# Altium PCB pcb_SiAlarmV1.PcbDoc
Units mil, origin at the board's own origin, x right, y up, seen from the top; angles counter-clockwise.
Board outline 6000 x 4000 mil, 2 copper layers (Top Layer, Bottom Layer); 26 components, 39 nets, 225 pads, 0 vias.
Unrouted connection lines stored in the file: 83.
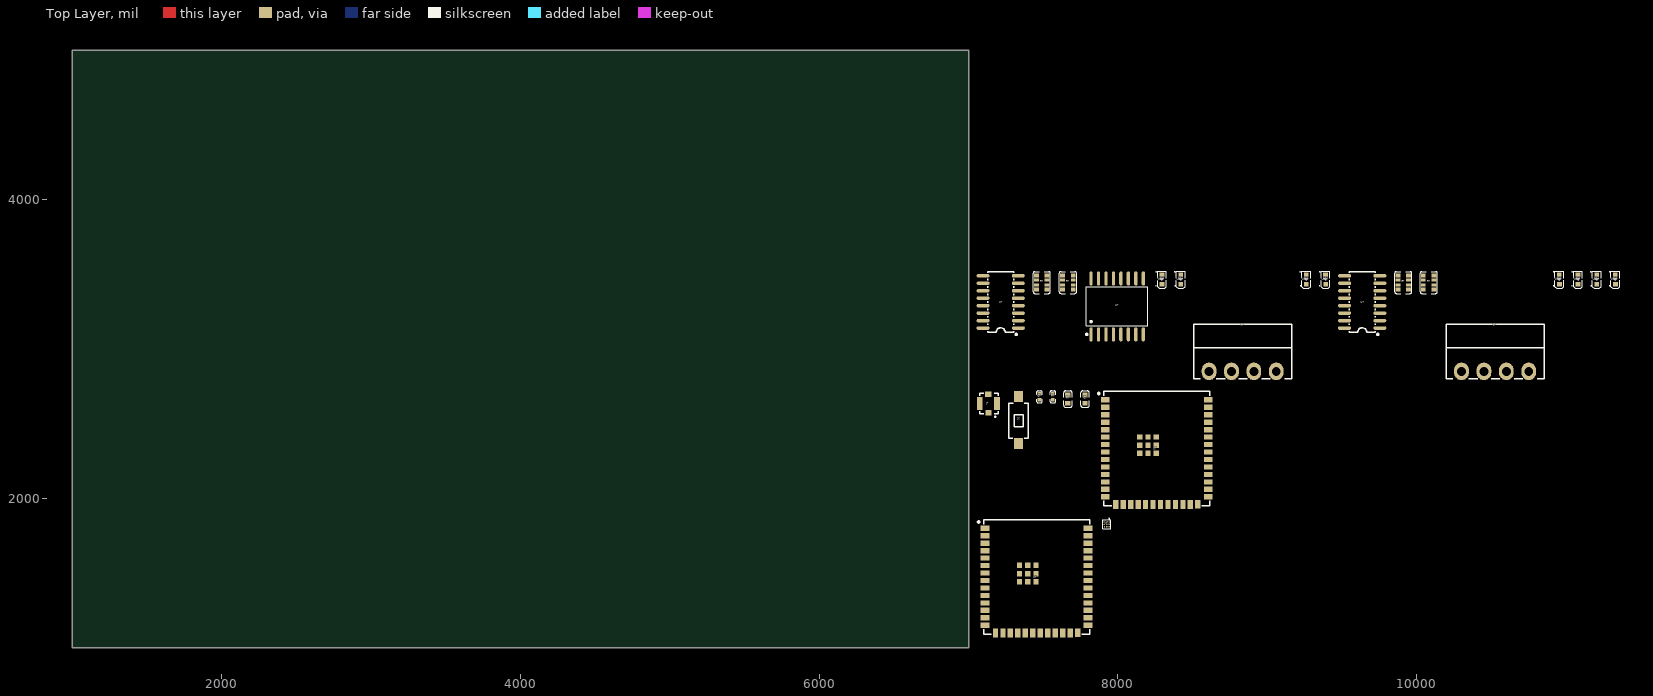
[diagram p0: Top Layer view]
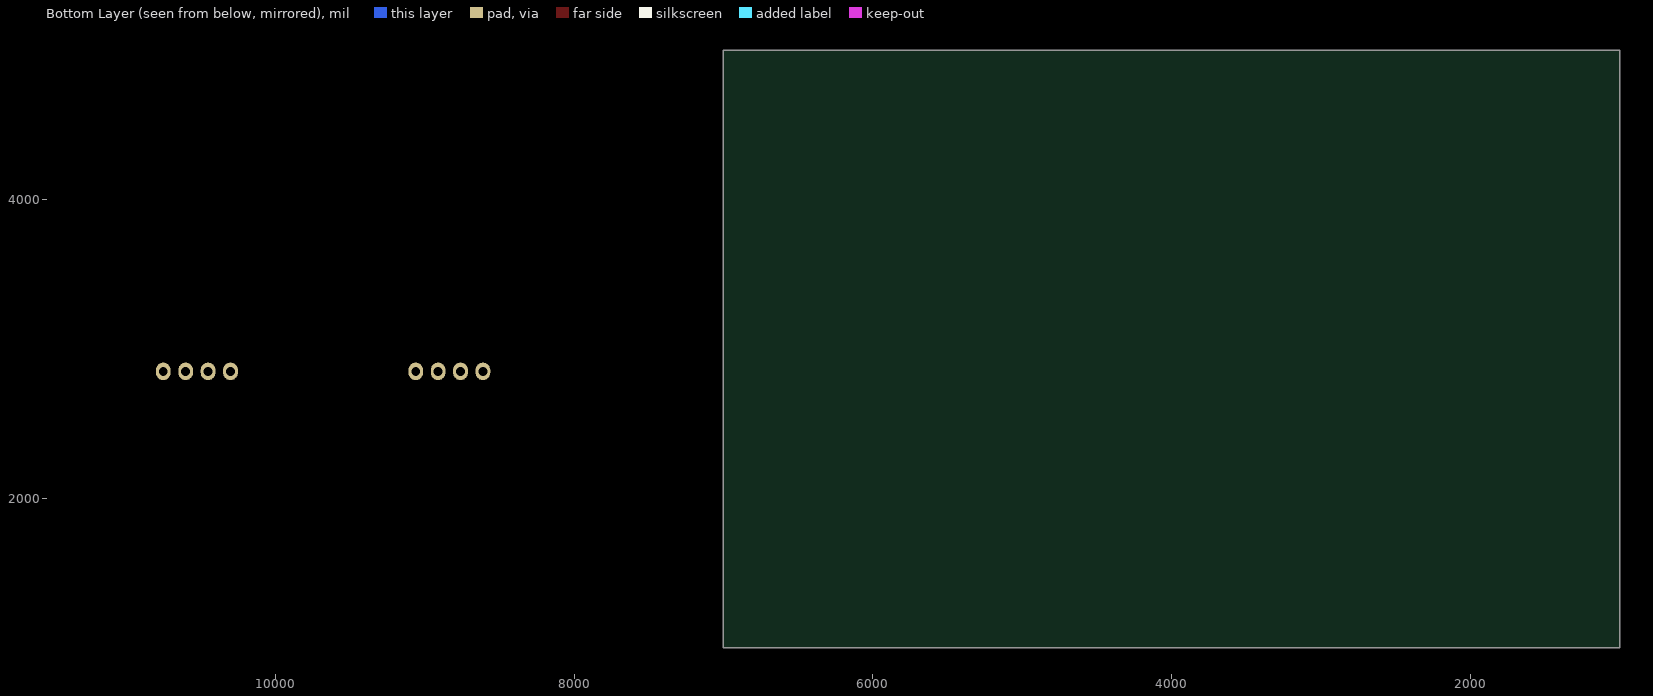
[diagram p1: Bottom Layer view, seen from below]

## Layer stack, top to bottom
Top Solder: solder mask 0.4, Solder Resist, Dk 3.5
Top Layer: signal copper 1.4
Dielectric 1: dielectric 12.6, FR-4, Dk 4.8
Bottom Layer: signal copper 1.4
Bottom Solder: solder mask 0.4, Solder Resist, Dk 3.5

## Board outline
1000,1000 7000,1000 7000,5000 1000,5000

## Design rules (kind name [scope] priority, off if disabled: settings)
Clearance [All] p1: gap=10 ignorepadtopadclearanceinfootprint=FALSE except(0: Arc-Hole Track-Hole SMDPad-Hole THPad-Hole Via-Hole Fill-Hole Poly-Hole Region-Hole Text-Hole)
PolygonConnect [All] p1: connectstyle=Relief reliefconductorwidth=10 reliefentries=4 polygonreliefangle="90 Angle" airgapwidth=10
RoutingVias [All] p1: holewidth=28 width=50 viastyle="Through Hole" minholewidth=28 minwidth=50 maxholewidth=28 maxwidth=50
SolderMaskExpansion [All] p1: expansion=4 istentingtop=FALSE
Width [All] p1: maxlimit=10 minlimit=10 preferedwidth=10
30 further rules are at their usual default settings.

## Classes and differential pairs
component class sch_io: J? LED? R? U?
component class sch_controller: C? J? R? S? U?

## Components (designator, comment, footprint, x,y, rotation, side; value= is the part's Value field where it differs from the comment)
C? "10uF 10V" 0603 7780,2665 r90 top
C? "1uF" 0402 7475,2680 r90 top
J? "UFL" UFL 7075,2635 r0 top
J? "Phonix 4P RA 3.81" TER4-R-3.81 8835,2850 r0 top
J? "Phonix 4P RA 3.81" TER4-R-3.81 10525,2850 r0 top
LED? "Led Yellow" LED0603Y 8420,3465 r90 top
LED? "Led Yellow" LED0603Y 11330,3465 r90 top
LED? "Led Yellow" LED0603Y 9260,3465 r90 top
LED? "Led Yellow" LED0603Y 9390,3465 r90 top
LED? "Led Yellow" LED0603Y 11205,3465 r90 top
LED? "Led Yellow" LED0603Y 10955,3465 r90 top
LED? "Led Yellow" LED0603Y 11080,3465 r90 top
LED? "Led Yellow" LED0603Y 8295,3465 r90 top
R? "2.2KΩ 4x0603" 0603ARRAY 7490,3445 r90 top
R? "10KΩ" 0402 7565,2680 r90 top
R? "0Ω" 0603 7665,2665 r90 top
R? "10KΩ 4x0603" 0603ARRAY 10080,3445 r90 top
R? "2.2KΩ 4x0603" 0603ARRAY 9910,3445 r90 top
R? "10KΩ 4x0603" 0603ARRAY 7665,3445 r90 top
S? "SW Tactile 2P" SW-SMD_L6.0-W3.3-LS8.0 7335,2525 r90 top
U? "'" WIRELM-SMD_ESP32-S3-WROOM-1U 7455,1450 r0 top
U? "MAX98357AEWL+T" WLP-9_L1.4-W1.3-P0.40-R3-C3-BR 7925,1825.75 r90 top
U? "ESP32-S3-WROOM-1U-N16R8" WIRELM-SMD_ESP32-S3-WROOM-1U 8260,2310 r0 top
U? "Opto ELQ3H4(TA)-G" SOP-16_L10.3-W4.4-P1.27-LS7.0-BL 7215,3315 r90 top
U? "Opto ELQ3H4(TA)-G" SOP-16_L10.3-W4.4-P1.27-LS7.0-BL 9635,3315 r90 top
U? "PCF8574" SOIC-16_L10.3-W7.5-P1.27-LS10.3-BL 7995,3285 r0 top

## Footprints (in the part's own frame and the unit in brackets; to place one, negate y for a bottom-side part, rotate by r counter-clockwise, add the part's x,y. Pads: shape width x height; smd on the part's side, far side on the other; paste and mask are expansions set on the pad)
0402 [mm]
  rect 0.6x0.6 smd: 1(-0.542,0) 2(0.542,0)
  silkscreen extent -1.01,-0.44 1.01,0.44, body extent -0.47,-0.27 0.53,0.25, height 0.49
0603 [mm]
  rect 0.8x0.9 smd paste+0 mask+0.051: 1(-0.7,0) 2(0.7,0)
  silkscreen extent -1.41,-0.71 1.39,0.72, body extent -0.78,-0.44 0.82,0.39, height 0.81
0603ARRAY [mm]
  rect 0.65x0.8 smd paste+0 mask+0.051: 1(-1.2,-0.9) 4(1.2,-0.9) 5(1.2,0.9) 8(-1.2,0.9)
  rect 0.5x0.8 smd paste+0 mask+0.051: 2(-0.4,-0.9) 3(0.4,-0.9) 6(0.4,0.9) 7(-0.4,0.9)
  silkscreen extent -1.87,-1.47 1.87,1.47
LED0603Y [mm]
  rect 0.8x0.8 smd paste+0 mask+0.051: A(0.799,0.004) K(-0.799,-0.004)
  silkscreen extent -1.49,-0.75 1.39,1.08, body extent -1,-0.63 1,0.63, height 0.4
SOIC-16_L10.3-W7.5-P1.27-LS10.3-BL [mil]
  oval 22.6x94.51 smd: 1(-175,-187.02) 2(-125,-187.02) 3(-75,-187.02) 4(-25,-187.02) 5(25,-187.02) 6(75,-187.02) 7(125,-187.02) 8(175,-187.02) 9(175,187.02) 10(125,187.02) 11(75,187.02) 12(25,187.02) 13(-25,187.02) 14(-75,187.02) 15(-125,187.02) 16(-175,187.02)
  silkscreen extent -210,-193 206,131
SOP-16_L10.3-W4.4-P1.27-LS7.0-BL [mm]
  oval 0.6x2.2 smd paste+0 mask+0.051: 1(-4.445,-3) 2(-3.175,-3) 3(-1.905,-3) 4(-0.635,-3) 5(0.635,-3) 6(1.905,-3) 7(3.175,-3) 8(4.445,-3) 9(4.445,3) 10(3.175,3) 11(1.905,3) 12(0.635,3) 13(-0.635,3) 14(-1.905,3) 15(-3.175,3) 16(-4.445,3)
  silkscreen extent -5.66,-2.79 5.15,2.2
SW-SMD_L6.0-W3.3-LS8.0 [mm]
  rect 1.9x1.5 smd paste+0 mask+0.051: 1(-4,0) 2(4,0)
  silkscreen extent -3.14,-1.67 2.86,1.63
TER4-R-3.81 [mm]
  oval 2.5x3 hole 1.5: 1(-5.715,0) 2(-1.905,0) 3(1.905,0) 4(5.715,0)
  silkscreen extent -8.36,-1.27 8.38,8, body extent -8.38,-1.29 8.25,17.11, height 7.88
UFL [mm]
  rect 1.015x1 smd: 1(1.461,-1.566)
  rect 1x2.18 smd: 2(0,0) 2(2.92,0)
  rect 1.15x1 smd: 2(1.46,1.565)
  Top Layer pour cut-out: 0.606,-1 2.311,-1 2.311,1 0.606,1
  silkscreen extent -0.01,-2.35 3.15,1.75
WIRELM-SMD_ESP32-S3-WROOM-1U [mm]
  rect 1.5x0.9 smd paste+0 mask+0.05: 1(-8.75,8.895) 2(-8.75,7.625) 3(-8.75,6.355) 4(-8.75,5.085) 5(-8.75,3.815) 6(-8.75,2.545) 7(-8.75,1.275) 8(-8.75,0.005) 9(-8.75,-1.265) 10(-8.75,-2.535) 11(-8.75,-3.805) 12(-8.75,-5.075) 13(-8.75,-6.345) 14(-8.75,-7.615) 27(8.75,-7.615) 28(8.75,-6.345) 29(8.75,-5.075) 30(8.75,-3.805) 31(8.75,-2.535) 32(8.75,-1.265) 33(8.75,0.005) 34(8.75,1.275) 35(8.75,2.545) 36(8.75,3.815) 37(8.75,5.085) 38(8.75,6.355) 39(8.75,7.625) 40(8.75,8.895)
  rect 0.9x1.5 smd paste+0 mask+0.05: 15(-6.985,-8.895) 16(-5.715,-8.895) 17(-4.445,-8.895) 18(-3.175,-8.895) 19(-1.905,-8.895) 20(-0.635,-8.895) 21(0.635,-8.895) 22(1.905,-8.895) 23(3.175,-8.895) 24(4.445,-8.895) 25(5.715,-8.895) 26(6.985,-8.865)
  rect 0.9x0.9 smd: 41(-2.9,-0.225) 41(-2.9,1.175) 41(-2.9,2.575) 41(-1.5,-0.225) 41(-1.5,1.175) 41(-1.5,2.575) 41(-0.1,-0.225) 41(-0.1,1.175) 41(-0.1,2.575)
  silkscreen extent -10.04,-9.14 9.02,10.36
WLP-9_L1.4-W1.3-P0.40-R3-C3-BR [mm]
  round 0.23 smd paste+0 mask+0.051: A1(0.4,-0.4) A2(0,-0.4) A3(-0.4,-0.4) B1(0.4,0) B2(0,0) B3(-0.4,0) C1(0.4,0.4) C2(0,0.4) C3(-0.4,0.4)
  silkscreen extent -0.75,-0.7 1.04,0.7

## Part data
C?: library part "C10UF 10V", JLC=C19702, MFAC=CL10A106KP8NNNC
C?: library part "C1uF0402 25V", JLC=C52923, MFAC=CL05A105KA5NQNC
J?: library part BNC
J? J?: library part "Phonix 4P RA", JLC=C395698, MFAC=DB2ERC-3.81-4P-GN
LED? LED? LED? LED? LED? LED? LED? LED?: library part LedYellow, JLC=C965808, MFAC=XL-1608UWC-04
R? R?: library part "R2.2K Array", JLC=C12001, MFAC=4D03WGJ0222T5E
R?: library part R10K0402, JLC=C60490, MFAC=RC0402FR-0710KL
R?: library part R0R, JLC=C21189, MFAC=0603WAF0000T5E
R? R?: library part "R10K Array", JLC=C29718, MFAC=4D03WGJ0103T5E
S?: library part "SW Tactile Reset 2P", JLC=C318938, MFAC=TS-1101-C-W
U?: library part ESP32-S3-WROOM-1U-N16R8, JLC=C3013946, MFAC=ESP32-S3-WROOM-1U-N16R8
U?: JLCPCB Part Class="Extended Part", Manufacturer=ADI(亚德诺)/MAXIM(美信), Operating Temperature=-40℃~+85℃, Supply Voltage=2.5V~5.5V, Add into BOM=yes, Convert to PCB=yes, Datasheet=https://atta.szlcsc.com/upload/public/pdf/source/20210106/C2682619_15CCD654F2C559A2FC5FDCA8EA0D4E6D.pdf, Device=MAX98357AEWL+T, LCSC Part Name=MAX98357AEWL+T, Manufacturer Part=MAX98357AEWL+T, Speaker Channels=单声道, Supplier=LCSC, Supplier Footprint=BGA-9(1.3x1.3), Supplier Part=C2682619, Symbol=MAX98357AEWL+T
U?: JLC=C3013946, MFAC=ESP32-S3-WROOM-1U-N16R8
U? U?: library part ELQ3H4(TA)-G, JLC=C150957, MFAC=ELQ3H4(TA)-G
U?: JLC=C7605, MFAC=PCF8574T/3,518

## Nets (pads, with @x,y where several pads share a name; then routed paths per layer and width w, separated by ;. In a path a pad name is that pad's centre, name@x,y a point inside that pad or via, vN(x,y) a via of type N, cw(c..) or ccw(c..) an arc to the next point about the centre after c; other vN are vias at no path point)
+3.3V: R?.2@7565,2701.33 R?.5@7629.57,3492.24 R?.5@10044.57,3492.24 R?.6@7629.57,3460.75 R?.6@10044.57,3460.75 R?.7@7629.57,3429.25 R?.7@10044.57,3429.25 R?.8@7629.56,3397.76 R?.8@10044.56,3397.76 U?.2@7915.51,2610.2 U?.16@7820,3472.02
+5V: U?.A2
/IOEXINT: U?.13@7970,3472.02
BCLK: U?.C1
blu: J?.1@7132.52,2573.35
DIN: U?.B1
ESP32_ProInt: C?.1@7475,2658.67 R?.1@7565,2658.67 S?.2 U?.27@8604.49,2010.2
GND: C?.2 J?.2@7075,2635 J?.2@7132.48,2696.61 J?.2@7189.96,2635 R?.1@7665,2637.45 S?.1 U?.1@7820,3097.98 U?.1@7915.51,2660.2 U?.2@7870,3097.98 U?.3@7920,3097.98 U?.8@8170,3097.98 U?.9@7096.89,3490 U?.9@9516.89,3490 U?.11@7096.89,3390 U?.11@9516.89,3390 U?.13@7096.89,3290 U?.13@9516.89,3290 U?.15@7096.89,3190 U?.15@9516.89,3190 U?.40@8604.49,2660.2 U?.41@8145.82,2301.14 U?.41@8145.82,2356.26 U?.41@8145.82,2411.38 U?.41@8200.94,2301.14 U?.41@8200.94,2356.26 U?.41@8200.94,2411.38 U?.41@8256.06,2301.14 U?.41@8256.06,2356.26 U?.41@8256.06,2411.38 U?.C2
LRCLK: U?.C3
NetC?_1: C?.1@7780,2637.45 U?.3@7915.51,2560.2
NetJ?_1: J?.1@10300,2850 LED?.K@10955.14,3433.52
NetJ?_2: J?.2@8760,2850 LED?.K@8295.14,3433.52
NetJ?_3: J?.3@10600,2850 LED?.K@11330.14,3433.52
NetJ?_4: J?.4@9060,2850 LED?.K@9260.14,3433.52
NetR?_1: R?.1@9945.43,3397.76 U?.7@9753.11,3440
NetR?_2: R?.2@7525.43,3429.25 U?.5@7333.11,3340
NetR?_3: R?.3@7525.43,3460.75 U?.3@7333.11,3240
NetR?_4: R?.4@9945.44,3492.24 U?.1@9753.11,3140
RXD: U?.2@7110.51,1750.2
SCL: U?.14@7920,3472.02
SDA: U?.15@7870,3472.02
TXD: U?.1@7110.51,1800.2
VBAT: R?.5@7454.57,3492.24 R?.5@9874.57,3492.24 R?.6@7454.57,3460.75 R?.6@9874.57,3460.75 R?.7@7454.57,3429.25 R?.7@9874.57,3429.25 R?.8@7454.56,3397.76 R?.8@9874.56,3397.76
Z0: LED?.A@11204.86,3496.48 U?.2@9753.11,3190
Z1: LED?.A@11329.86,3496.48 U?.4@9753.11,3290
Z2: LED?.A@11079.86,3496.48 U?.6@9753.11,3390
Z3: LED?.A@10954.86,3496.48 U?.8@9753.11,3490
Z4: LED?.A@9259.86,3496.48 U?.2@7333.11,3190
Z5: LED?.A@8419.86,3496.48 U?.4@7333.11,3290
Z6: LED?.A@8294.86,3496.48 U?.6@7333.11,3390
Z7: LED?.A@9389.86,3496.48 U?.8@7333.11,3490
Zi0: R?.4@10115.44,3492.24 U?.4@7970,3097.98 U?.16@9516.89,3140
Zi1: R?.3@10115.43,3460.75 U?.5@8020,3097.98 U?.14@9516.89,3240
Zi2: R?.2@10115.43,3429.25 U?.6@8070,3097.98 U?.12@9516.89,3340
Zi3: R?.1@10115.43,3397.76 U?.7@8120,3097.98 U?.10@9516.89,3440
Zi4: R?.4@7700.44,3492.24 U?.9@8170,3472.02 U?.16@7096.89,3140
Zi5: R?.3@7700.43,3460.75 U?.10@8120,3472.02 U?.14@7096.89,3240
Zi6: R?.2@7700.43,3429.25 U?.11@8070,3472.02 U?.12@7096.89,3340
Zi7: R?.1@7700.43,3397.76 U?.10@7096.89,3440 U?.12@8020,3472.02
pads on no net: J?.1@8610,2850 J?.2@10450,2850 J?.3@8910,2850 J?.4@10750,2850 LED?.K@8420.14,3433.52 LED?.K@9390.14,3433.52 LED?.K@11080.14,3433.52 LED?.K@11205.14,3433.52 R?.1@7525.43,3397.76 R?.2@7665,2692.55 R?.2@9945.43,3429.25 R?.3@9945.43,3460.75 R?.4@7525.44,3492.24 U?.1@7333.11,3140 U?.3@7110.51,1700.2 U?.3@9753.11,3240 U?.4@7110.51,1650.2 U?.4@7915.51,2510.2 U?.5@7110.51,1600.2 U?.5@7915.51,2460.2 U?.5@9753.11,3340 U?.6@7110.51,1550.2 U?.6@7915.51,2410.2 U?.7@7110.51,1500.2 U?.7@7333.11,3440 U?.7@7915.51,2360.2 U?.8@7110.51,1450.2 U?.8@7915.51,2310.2 U?.9@7110.51,1400.2 U?.9@7915.51,2260.2 U?.10@7110.51,1350.2 U?.10@7915.51,2210.2 U?.11@7110.51,1300.2 U?.11@7915.51,2160.2 U?.12@7110.51,1250.2 U?.12@7915.51,2110.2 U?.13@7110.51,1200.2 U?.13@7915.51,2060.2 U?.14@7110.51,1150.2 U?.14@7915.51,2010.2 U?.15@7180,1099.81 U?.15@7985,1959.81 U?.16@7230,1099.81 U?.16@8035,1959.81 U?.17 U?.18 U?.19 U?.20 U?.21 U?.22 U?.23 U?.24 U?.25 U?.26 U?.27@7799.49,1150.2 U?.28 U?.29 U?.30 U?.31 U?.32 U?.33 U?.34 U?.35 U?.36 U?.37 U?.38 U?.39 U?.40@7799.49,1800.2 U?.41@7340.82,1441.14 U?.41@7340.82,1496.26 U?.41@7340.82,1551.38 U?.41@7395.94,1441.14 U?.41@7395.94,1496.26 U?.41@7395.94,1551.38 U?.41@7451.06,1441.14 U?.41@7451.06,1496.26 U?.41@7451.06,1551.38 U?.A1 U?.A3 U?.B2 U?.B3